# Altium PCB MainFCC_PCBBoard.PcbDoc (part 3 of 3)
Units mm, origin at the board's own origin, x right, y up, seen from the top; angles counter-clockwise.
Board outline 100 x 50 mm, 6 copper layers (Top Signal, GND1, Power, Signal, GND 2, Bottom Signal), stack 1.642 mm thick; 119 components, 79 nets, 546 pads, 1133 vias.
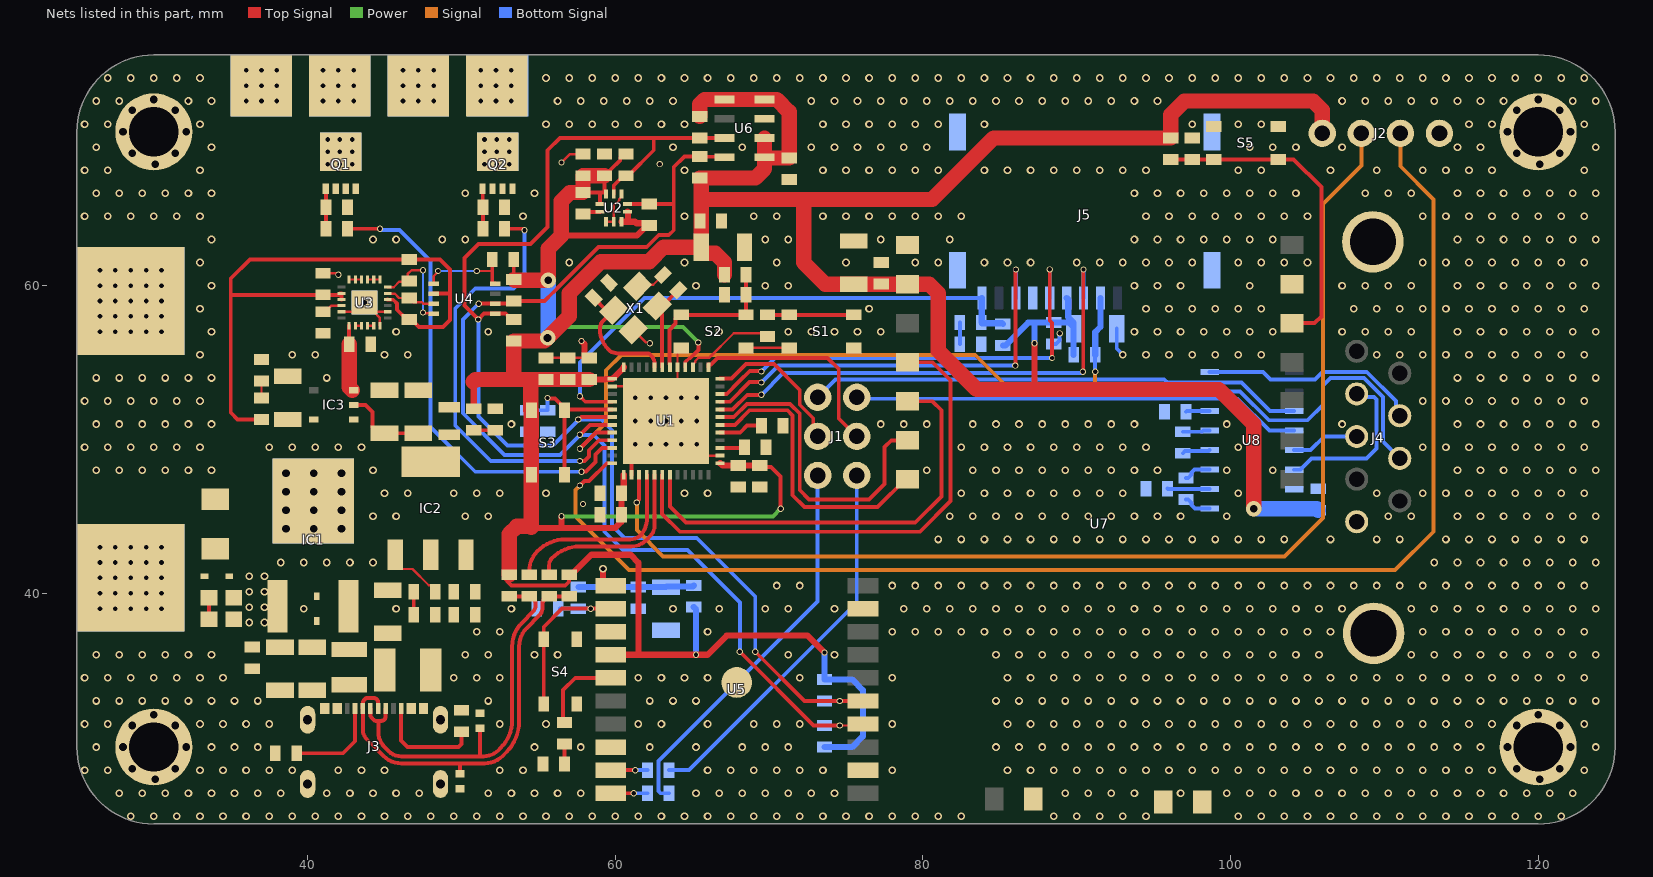
[diagram p6: the nets of this part, all layers, seen from the top]

## Part data (continued)
U8: library part MergenElektronik_Interfaces_RS232s_MAX3232ESE+, "Mergen Elektronik - Interfaces - RS232s - MAX3232ESE+", Manufacturer="Analog Devices Inc./Maxim Integrated", Operating Supply Voltage="3V up to 5.5V", Package=SOIC-16, Supplier Part Number 1=MAX3232ESE+-ND, Temperature="-40°C up to 85°C", Digi-Key Number=MAX3232ESE+-ND, Farnell Number=2519459, Manufacturer Number=MAX3232ESE+, Model="RS232 Interfaces", Mounting Type="Surface Mount", Mouser Number=700-MAX3232ESE, Protocol=RS232, Supplier 1=Digi-Key, Supplier 2=Mouser, Supplier Part Number 2=700-MAX3232ESE
X1: library part MergenElektronik_Oscillators_Crystals_4_SMD_26MHz, "Mergen Elektronik - Oscilators - Crystals - 4-SMD - 26 MHz", Load Capacitance="18 pF", Manufacturer="TXC CORPORATION", Manufacturer Number=7M-26.000MAAJ-T, Package=4-SMD, Supplier Part Number 1=2151-RH100-12.000-18-2030-TRCT-ND, Temperature="-20°C up to 70°C", Digi-Key Number=887-1133-2-ND, Farnell Number=1842069, Frequency="26 MHz", Model="Crystal Oscilator", Mounting Type="Surface Mount", Mouser Number=717-7M-26.000MAAJ-T, Supplier 1=Digi-Key, Supplier 2=Mouser, Supplier Part Number 2=717-7M-26.000MAAJ-T

## Free pads (board coordinates)
  round 5 hole 3.2: 1(30,70) 2(30,30) 3(120,70) 4(120,30)
  rect 7x7 smd: 5(28.5,59) c(28.5,41)
  rect 7x7 smd far side: 5(28.5,59) c(28.5,41)
  round 0.5 hole 0.5: 6(30,32.1) 6(30,72.1) 6(120,32.1) 6(120,72.1) 7(32.1,30) 7(32.1,70) 7(122.1,30) 7(122.1,70) 8(30.1,27.9) 8(30.1,67.9) 8(31.4,28.6) 8(31.4,68.6) 8(120.1,27.9) 8(120.1,67.9) 8(121.4,28.6) 8(121.4,68.6) 9(28,30) 9(28,70) 9(28.6,28.6) 9(28.6,31.4) 9(28.6,68.6) 9(28.6,71.4) 9(31.4,31.4) 9(31.4,71.4) 9(118,30) 9(118,70) 9(118.6,28.6) 9(118.6,31.4) 9(118.6,68.6) 9(118.6,71.4) 9(121.4,31.4) 9(121.4,71.4)
  rect 4x4 smd: 10(37,73) 10(42.1,73) 10(47.2,73) 10(52.3,73)
  rect 4x4 smd far side: 10(37,73) 10(42.1,73) 10(47.2,73) 10(52.35,73)
  rect 4x4 on Mid2: 10(37,73) 10(47.2,73)

## Via types
v1: diameter 0.5, hole 0.3, Top Signal to Bottom Signal, tented both sides, 987 vias
v2: diameter 0.5, hole 0.3, Top Signal to Bottom Signal, 86 vias
v3: diameter 0.406, hole 0.279, Top Signal to Bottom Signal, tented both sides, 44 vias
v4: diameter 0.5/0/0.5 (per signal layer), hole 0.3, Top Signal to Power, tented both sides, 8 vias
v5: diameter 1, hole 0.5, Top Signal to Bottom Signal, tented both sides, 3 vias
v6: diameter 0.406, hole 0.279, Top Signal to Power, tented both sides, 3 vias
v7: diameter 0.7, hole 0.7, Top Signal to Bottom Signal, 2 vias

## Nets (pads, with @x,y where several pads share a name; then routed paths per layer and width w, separated by ;. In a path a pad name is that pad's centre, name@x,y a point inside that pad or via, vN(x,y) a via of type N, cw(c..) or ccw(c..) an arc to the next point about the centre after c; other vN are vias at no path point)
1V8: C8.1 C32.1 IC3.5 R3.1 R18.2 R19.2 U3.8 U3.9 U3.22 U4.2 | length 43.2
  Top Signal w0.254: R3.1@37,51.3 35.45,51.3 35,51.75 35,59.375 ; U3.9@42.2,59.1 U3.8@42.2,59.5 42.104,59.5 42.004,59.4 C32.1@41,59.4 35.025,59.4 35,59.375 ; U3.22@45.2,59.1 45.221,59.079 45.566,59.079 45.821,58.825 45.821,58.429 46.45,57.8 R18.2@46.6,57.8 46.75,57.8 47.25,57.3 48.8,57.3 49.255,57.755 49.255,59.4 ; U4.2@48.2,59.475 49.18,59.475 49.255,59.4 ; 35,59.375 35,60.45 36.25,61.7 R19.2@46.6,61.7 48.6,61.7 49.255,61.045 49.255,59.4
3V3: C6.1 C7.1 C9.1 C10.1 C11.1 C12.1 C13.1 C14.1 C15.1 C16.1 C17.1 C29.1 C30.1 C31.1 C37.1 C38.1 C39.1 C41.1 C46.1 C47.1 FB1.1 IC3.1 IC3.3 J2.4 J5.P4 PTC1.2 R2.1 R5.1 R8.2 R9.2 R14.2 R15.2 R16.2 R17.2 R20.2 R21.2 R22.1 R23.1 R28.2 R29.2 R30.1 R35.1 R36.1 S3.1 U1.1 U1.9 U1.24 U1.36 U1.48 U2.1 U2.5 U2.6 U2.10 U3.13 U5.4 U6.1 U6.2 U6.4 U6.5 U7.2 U8.16 | length 303.3
  Top Signal w0.254: C31.1@42.7,56.2 U3.13@42.7,57.4 ; R8.2@53.1,41.2 53,41.1 53,40.75 53.25,40.5 56.75,40.5 57,40.75 R9.2@57,41.2 ; R20.2@53.4,60.4 R17.2@53.4,61.7 ; R16.2@57.9,66.05 59,66.05 ; U2.6@59,65.3 59,66.05 ; R15.2@60.7,68.55 60.55,68.55 60.327,68.327 60.327,68.177 59.673,67.523 59.673,67.373 59.45,67.15 C29.1@59.3,67.15 59.3,66.221 59.398,66.123 59.398,66.05 59,66.05 ; U1.9@64.55,54.7 64.552,54.702 64.552,55.022 64.809,55.279 64.875,55.279 65.4,55.805 v6(65.4,56.3) ; C14.1@69.4,48.3 69.481,48.219 70.132,48.219 70.75,47.601 v6(70.75,45.5)
  Top Signal w0.3: 65.5,65.6 65.6,65.6
  Top Signal w0.4: 42.7,53.5 42.9,53.3 42.9,53.2 IC3.3@43,53.2 ; R2.1@50.8,52 50.8,53.466 ; 54.55,44.298 54.5,44.248 56.5,44.248 ; v6(56.5,45) 56.5,44.248 ; 56.5,63.25 61.4,63.25 62.05,63.9 R14.2@62.2,63.9 62.05,64.05 61.375,64.05 61.275,64.15 60.838,64.15 ; R9.2@57,41.2 57.15,41.2 58.45,42.5 61,42.5 61.5,42 61.5,36 ; C10.1@58.3,53.9 59.327,53.9 59.354,53.927 59.777,53.927 U1.48@59.8,53.95 59.825,53.95 60.55,54.675 U1.1@60.55,54.7 ; U5.4@59.7,36 61.5,36 ; U2.10@60.4,64.15 60.838,64.15 ; U1.36@60.55,47.7 60.55,46.65 C11.1@60.4,46.5 C12.1@60.4,45.1 60.4,44.65 59.998,44.248 56.5,44.248 ; U2.1@60.8,64.8 60.838,64.762 60.838,64.15 ; U1.24@66.8,48.45 66.825,48.45 66.975,48.3 C13.1@68,48.3 C14.1@69.4,48.3 ; 70.5,72.1 70.9,72.1 ; v3(73.6,36.148) v3(73.6,36.148) 72.5,37.25 67.25,37.25 66.001,36.001 65.251,36.001 v3(65.25,36) 61.5,36 ; 80.766,60 81,59.766 81,59.5 ; 87,53.25 87.25,53.5 v3(87.25,56.25)
  Top Signal w1: C31.1@42.7,56.2 42.7,53.4 IC3.3@42.9,53.2 ; 50.75,53.75 50.9,53.9 53.5,53.9 ; R8.2@53.1,41.2 53.1,43.85 53.598,44.348 54.5,44.348 54.55,44.298 S3.1@54.55,47.7 S3.1@54.55,51.9 ; R20.2@53.4,60.4 53.45,60.35 v5(55.65,60.35) 55.65,62.4 56.5,63.25 56.5,65.5 57.05,66.05 R16.2@57.9,66.05 C30.1@57.9,67.15 C29.1@59.3,67.15 ; S3.1@54.5,51.9 54.5,53.9 ; C10.1@58.3,53.9 C15.1@56.9,53.9 C9.1@55.5,53.9 54.5,53.9 ; R29.2@65.5,71 65.5,71.8 65.8,72.1 U6.5@67.1,72.1 U6.4@69.7,72.1 70.5,72.1 71.3,71.3 C37.1@71.3,68.3 69.75,68.3 U6.1@69.7,68.35 ; R5.1@67.1,60.7 67.1,61.514 66.514,62.1 65.6,62.1 C16.1@65.6,62.5 ; U6.2@69.7,69.6 U6.1@69.7,68.35 ; v5(101.5,45.5) 101.5,51 99.25,53.25 87,53.25 83.5,53.25 81,55.75 81,59.5 80.4,60.1 U7.2@79,60.1 C39.1@77.3,60.1 C38.1@75.5,60.1 73.65,60.1 72.25,61.5 72.25,65.6 ; J2.4@105.96,69.9 105.96,71.414 105.374,72 97,72 96.1,71.1 R30.1@96.1,69.6 84.6,69.6 80.6,65.6 72.25,65.6 ; 53.5,53.9 53.4,54 R21.2@53.4,56.4 55.4,56.4 v5(55.6,56.6) 57.001,58.001 57.001,59.497 57.209,59.704 57.209,59.709 59.063,61.563 62.21,61.563 63.147,62.5 C16.1@65.6,62.5 ; 53.5,53.9 54.5,53.9 ; C16.1@65.6,62.5 65.6,65.6 ; 65.6,65.6 72.25,65.6 ; 65.6,65.6 65.6,66.9 R28.2@65.5,67 69.114,67 69.7,67.586 U6.1@69.7,68.35
  Power w0.254: v5(55.6,56.6) 56.3,57.3 64.4,57.3 v6(65.4,56.3) ; v6(56.5,45) 70.25,45 v6(70.75,45.5)
  Bottom Signal w0.4: FB1.1@65.1,39.1 65.25,38.95 v3@65.25,36.002 ; R22.1@73.6,30 75.4,30 76.1,30.7 76.1,33.7 75.4,34.4 R23.1@73.6,34.4 v3(73.6,36.148) ; R36.1@85.2,56.1 85.35,56.1 86.85,57.6 87.25,57.6 ; v3(87.25,56.25) 87.25,57.6 ; J5.P4@89.345,59.2 89.445,59.1 89.445,57.955 89.8,57.6 89.8,57.3 89.5,57.6 C47.1@88.5,57.6 87.25,57.6 ; R35.1@89.8,55.5 C46.1@89.8,57.2
  Bottom Signal w1: v5(55.6,56.6) 55.65,56.65 v5(55.65,60.35) ; v5(101.5,45.5) 105.6,45.5 C41.1@105.7,45.4
5V: C3.1 C4.1 C5.1 D3.2 IC1.3 IC2.3 R1.1
CTS: J4.7 U8.8 | length 14.4
  Bottom Signal w0.254: U8.8@98.636,54.393 102.107,54.393 102.597,53.903 105.479,53.903 105.972,54.396 108.854,54.396 110.762,52.488 110.762,51.778 J4.7@111,51.54
GND: C1.2 C2.2 C3.2 C4.2 C5.2 C6.2 C7.2 C8.2 C9.2 C10.2 C11.2 C12.2 C13.2 C14.2 C15.2 C16.2 C17.2 C18.2 C19.2 C20.2 C23.2 C24.2 C25.2 C26.2 C27.2 C28.2 C29.2 C30.2 C31.2 C32.2 C33.2 C34.2 C35.2 C36.2 C37.2 C38.2 C39.2 C40.2 C41.2 C42.2 C43.2 C46.2 C47.2 D2.2 D4.2 D5.2 D6.1 D7.1 D8.2 D9.2 IC1.2 IC2.1 IC3.2 J2.1 J3.A1 J3.A12 J3.B1 J3.B12 J3.Shield J4.5 J4.Shield J5.P6 J5.SHIELD pad.1 pad.2 pad.3 pad.4 pad.5 pad.6 pad.7 pad.8 pad.9 Q1.2 Q1.3 Q1.4 Q2.2 Q2.3 Q2.4 R6.1 R7.1 R12.2 R13.2 R33.1 R34.1 S1.2 S2.1 S4.1 S5.1 U1.8 U1.23 U1.35 U1.47 U1.49 U2.3 U2.8 U2.9 U3.11 U3.18 U3.20 U3.25 U5.3 U5.8 U5.12 U5.19 U5.21 U6.3 U7.1 U7.12 U7.13 U7.14 U7.23 U8.15 X1.3 | length 52.1
  Top Signal w0.152: C32.2@41,60.8 41.831,60.8 41.931,60.7 v3(42,60.7) ; U3.11@42.2,58.3 43.1,58.3 U3.25@43.7,58.9 ; U3.18@44.7,57.4 44.7,57.9 44.3,58.3 U3.20@45.2,58.3 ; IC2.1@45.7,42.5 45.7,42 46.124,41.576 46.824,41.576 47.876,40.524 48.026,40.524 48.3,40.25 D2.2@48.3,40.1 ; C9.2@55.5,55.3 C15.2@56.9,55.3 58.15,55.3 C10.2@58.3,55.3 ; v3(56.5,68) 57.05,68.55 C30.2@57.9,68.55 ; U2.8@59.4,64.15 U2.9@59.9,64.15 59.9,65.202 60.254,65.555 60.254,65.629 60.4,65.775 U2.3@60.4,65.95 ; U1.47@59.8,53.45 61.05,53.45 62.05,52.45 U1.49@63.3,51.2 ; X1.3@61.173,57.127 62.001,56.299 62.201,56.299 v3(62.25,56.25) ; X1.3@61.456,59.956 61.562,60.062 62.472,60.062 C24.2@63.105,60.695 ; S2.1@64.3,55.95 64.05,55.7 U1.8@64.05,54.7 64.05,51.95 U1.49@63.3,51.2 ; U1.23@66.8,48.95 65.55,48.95 64.55,49.95 U1.49@63.3,51.2 ; S2.1@68.5,55.95 S1.2@71.3,55.95
  Top Signal w0.254: C2.2@33.6,38.3 C1.2@33.6,39.7 ; J3.A1@40.97,32.5 J3.B12@41.27,32.5 ; IC3.2@43,52.25 43.75,52.25 44.227,51.773 44.227,50.773 44.6,50.4 C7.2@45,50.4 C6.2@47.2,50.4 ; J3.B1@47.38,32.5 J3.A12@47.68,32.5 ; C12.2@59,45.1 C12.2@59,45.25 ; U1.35@61.05,47.7 61.05,48.95 U1.49@63.3,51.2
  Top Signal w0.4: v3(57.8,56.4) 57.8,56.398 58,56.198 58,55.45 C10.2@58.15,55.3
  Bottom Signal w0.254: C47.2@88.5,56.2 88.65,56.2 88.873,56.423 88.873,56.867 v3(88.9,56.894) ; C46.2@92.6,57.2 92.6,55.9 v1(93,55.5)
  other v1: 28.5,25.5 30,25.5 31.5,25.5 33,25.5 34.5,25.5 36,25.5 37.5,25.5 39,25.5 40.5,25.5 42,25.5 43.5,25.5 45,25.5 46.5,25.5 48,25.5 49.5,25.5 51,25.5 52.5,25.5 54,25.5 55.5,25.5 57,25.5 58.5,25.5 60,25.5 61.5,25.5 63,25.5 64.5,25.5 66,25.5 67.5,25.5 69,25.5 70.5,25.5 72,25.5 73.5,25.5 75,25.5 76.5,25.5 78,25.5 79.5,25.5 81,25.5 82.5,25.5 88.5,25.5 90,25.5 91.5,25.5 93,25.5 94.5,25.5 100.5,25.5 102,25.5 103.5,25.5 105,25.5 106.5,25.5 108,25.5 109.5,25.5 111,25.5 112.5,25.5 114,25.5 115.5,25.5 117,25.5 118.5,25.5 120,25.5 121.5,25.5 27.75,27 29.25,27 30.75,27 32.25,27 33.75,27 35.25,27 36.75,27 38.25,27 41.25,27 42.75,27 44.25,27 45.75,27 47.25,27 51.75,27 53.25,27 54.75,27 56.25,27 57.75,27 65.25,27 66.75,27 68.25,27 69.75,27 71.25,27 72.75,27 74.25,27 89.25,27 90.75,27 92.25,27 93.75,27 96.75,27 99.75,27 101.25,27 102.75,27 104.25,27 105.75,27 107.25,27 108.75,27 110.25,27 111.75,27 113.25,27 114.75,27 116.25,27 117.75,27 119.25,27 120.75,27 122.25,27 25.5,28.5 27,28.5 33,28.5 34.5,28.5 36,28.5 37.5,28.5 39,28.5 42,28.5 43.5,28.5 45,28.5 52.5,28.5 54,28.5 66,28.5 67.5,28.5 69,28.5 70.5,28.5 72,28.5 73.5,28.5 78,28.5 85.5,28.5 87,28.5 88.5,28.5 90,28.5 91.5,28.5 93,28.5 94.5,28.5 96,28.5 97.5,28.5 99,28.5 100.5,28.5 102,28.5 103.5,28.5 105,28.5 106.5,28.5 108,28.5 109.5,28.5 111,28.5 112.5,28.5 114,28.5 115.5,28.5 117,28.5 123,28.5 26.25,30 33.75,30 35.25,30 36.75,30 54.75,30 57.75,30 62.25,30 65.25,30 68.25,30 69.75,30 71.25,30 84.75,30 86.25,30 87.75,30 89.25,30 90.75,30 92.25,30 93.75,30 95.25,30 96.75,30 98.25,30 99.75,30 101.25,30 102.75,30 104.25,30 105.75,30 107.25,30 108.75,30 110.25,30 111.75,30 113.25,30 114.75,30 116.25,30 123.75,30 25.5,31.5 27,31.5 33,31.5 34.5,31.5 36,31.5 37.5,31.5 52.5,31.5 55.5,31.5 61.5,31.5 63,31.5 66,31.5 69,31.5 70.5,31.5 72,31.5 78,31.5 85.5,31.5 87,31.5 88.5,31.5 90,31.5 91.5,31.5 93,31.5 94.5,31.5 96,31.5 97.5,31.5 99,31.5 100.5,31.5 102,31.5 103.5,31.5 105,31.5 106.5,31.5 108,31.5 109.5,31.5 111,31.5 112.5,31.5 114,31.5 115.5,31.5 117,31.5 123,31.5 26.25,33 27.75,33 29.25,33 30.75,33 32.25,33 33.75,33 35.25,33 36.75,33 51.75,33 62.25,33 63.75,33 65.25,33 84.75,33 86.25,33 87.75,33 89.25,33 90.75,33 92.25,33 93.75,33 95.25,33 96.75,33 98.25,33 99.75,33 101.25,33 102.75,33 104.25,33 105.75,33 107.25,33 108.75,33 110.25,33 111.75,33 113.25,33 114.75,33 116.25,33 117.75,33 119.25,33 120.75,33 122.25,33 123.75,33 25.5,34.5 27,34.5 28.5,34.5 30,34.5 31.5,34.5 33,34.5 34.5,34.5 49.5,34.5 51,34.5 52.5,34.5 61.5,34.5 63,34.5 64.5,34.5 66,34.5 72,34.5 78,34.5 85.5,34.5 87,34.5 88.5,34.5 90,34.5 91.5,34.5 93,34.5 94.5,34.5 96,34.5 97.5,34.5 99,34.5 100.5,34.5 102,34.5 103.5,34.5 105,34.5 106.5,34.5 108,34.5 109.5,34.5 111,34.5 112.5,34.5 114,34.5 115.5,34.5 117,34.5 118.5,34.5 120,34.5 121.5,34.5 123,34.5 26.25,36 27.75,36 29.25,36 30.75,36 32.25,36 33.75,36 50.25,36 51.75,36 54.75,36 56.25,36 71.25,36 74.25,36 84.75,36 86.25,36 87.75,36 89.25,36 90.75,36 92.25,36 93.75,36 95.25,36 96.75,36 98.25,36 99.75,36 101.25,36 102.75,36 104.25,36 105.75,36 111.75,36 113.25,36 114.75,36 116.25,36 117.75,36 119.25,36 120.75,36 122.25,36 123.75,36 51,37.5 52.5,37.5 66,37.5 78,37.5 79.5,37.5 81,37.5 82.5,37.5 84,37.5 85.5,37.5 87,37.5 88.5,37.5 90,37.5 91.5,37.5 93,37.5 94.5,37.5 96,37.5 97.5,37.5 99,37.5 100.5,37.5 102,37.5 103.5,37.5 105,37.5 106.5,37.5 112.5,37.5 114,37.5 115.5,37.5 117,37.5 118.5,37.5 120,37.5 121.5,37.5 123,37.5 39.75,39 45.75,39 53.25,39 63.75,39 66.75,39 69.75,39 71.25,39 74.25,39 78.75,39 80.25,39 81.75,39 83.25,39 84.75,39 86.25,39 87.75,39 89.25,39 90.75,39 92.25,39 93.75,39 95.25,39 96.75,39 98.25,39 99.75,39 101.25,39 102.75,39 104.25,39 105.75,39 107.25,39 111.75,39 113.25,39 114.75,39 116.25,39 117.75,39 119.25,39 120.75,39 122.25,39 123.75,39 70.5,40.5 72,40.5 78,40.5 79.5,40.5 81,40.5 82.5,40.5 84,40.5 85.5,40.5 87,40.5 88.5,40.5 90,40.5 91.5,40.5 93,40.5 94.5,40.5 96,40.5 97.5,40.5 99,40.5 100.5,40.5 102,40.5 103.5,40.5 105,40.5 106.5,40.5 108,40.5 109.5,40.5 111,40.5 112.5,40.5 114,40.5 115.5,40.5 117,40.5 118.5,40.5 120,40.5 121.5,40.5 123,40.5 38.25,42 39.75,42 41.25,42 42.75,42 44.25,42 113.25,42 114.75,42 116.25,42 117.75,42 119.25,42 120.75,42 122.25,42 123.75,42 81,43.5 82.5,43.5 84,43.5 85.5,43.5 87,43.5 88.5,43.5 90,43.5 91.5,43.5 93,43.5 94.5,43.5 96,43.5 97.5,43.5 99,43.5 100.5,43.5 102,43.5 103.5,43.5 106.5,43.5 109.5,43.5 111,43.5 114,43.5 115.5,43.5 117,43.5 118.5,43.5 120,43.5 121.5,43.5 123,43.5 44.25,45 45.75,45 50.25,45 51.75,45 81.75,45 83.25,45 84.75,45 86.25,45 87.75,45 89.25,45 90.75,45 92.25,45 93.75,45 95.25,45 96.75,45 99.75,45 110.25,45 111.75,45 114.75,45 116.25,45 117.75,45 119.25,45 120.75,45 122.25,45 123.75,45 45,46.5 46.5,46.5 49.5,46.5 51,46.5 52.5,46.5 55.5,46.5 64.5,46.5 66,46.5 82.5,46.5 84,46.5 85.5,46.5 87,46.5 88.5,46.5 90,46.5 91.5,46.5 93,46.5 100.5,46.5 109.5,46.5 112.5,46.5 114,46.5 115.5,46.5 117,46.5 118.5,46.5 120,46.5 121.5,46.5 123,46.5 26.25,48 27.75,48 29.25,48 30.75,48 32.25,48 33.75,48 44.25,48 80.25,48 83.25,48 84.75,48 86.25,48 87.75,48 89.25,48 90.75,48 92.25,48 93.75,48 95.25,48 99.75,48 102.75,48 114.75,48 116.25,48 117.75,48 119.25,48 120.75,48 122.25,48 123.75,48 25.5,49.5 27,49.5 28.5,49.5 30,49.5 31.5,49.5 33,49.5 37.5,49.5 39,49.5 40.5,49.5 42,49.5 43.5,49.5 82.5,49.5 84,49.5 85.5,49.5 87,49.5 88.5,49.5 90,49.5 91.5,49.5 93,49.5 94.5,49.5 100.5,49.5 112.5,49.5 114,49.5 115.5,49.5 117,49.5 118.5,49.5 120,49.5 121.5,49.5 123,49.5 26.25,51 27.75,51 29.25,51 30.75,51 32.25,51 33.75,51 53.25,51 77.25,51 78.75,51 80.25,51 83.25,51 84.75,51 86.25,51 87.75,51 89.25,51 90.75,51 92.25,51 93.75,51 99.75,51 107.25,51 114.75,51 116.25,51 117.75,51 119.25,51 120.75,51 122.25,51 123.75,51 25.5,52.5 27,52.5 28.5,52.5 30,52.5 31.5,52.5 33,52.5 112.5,52.5 114,52.5 115.5,52.5 117,52.5 118.5,52.5 120,52.5 121.5,52.5 123,52.5 26.25,54 27.75,54 29.25,54 30.75,54 32.25,54 33.75,54 41.25,54 114.75,54 116.25,54 117.75,54 119.25,54 120.75,54 122.25,54 123.75,54 33,55.5 39,55.5 40.5,55.5 45,55.5 46.5,55.5 94.5,55.5 96,55.5 97.5,55.5 99,55.5 100.5,55.5 102,55.5 109.5,55.5 111,55.5 112.5,55.5 114,55.5 115.5,55.5 117,55.5 118.5,55.5 120,55.5 121.5,55.5 123,55.5 33.75,57 45.75,57 51.75,57 66.75,57 71.25,57 72.75,57 74.25,57 75.75,57 77.25,57 93.75,57 95.25,57 96.75,57 98.25,57 99.75,57 101.25,57 102.75,57 107.25,57 108.75,57 110.25,57 111.75,57 114.75,57 116.25,57 117.75,57 119.25,57 120.75,57 122.25,57 123.75,57 33,58.5 76.5,58.5 94.5,58.5 96,58.5 97.5,58.5 99,58.5 100.5,58.5 102,58.5 108,58.5 109.5,58.5 111,58.5 112.5,58.5 114,58.5 115.5,58.5 117,58.5 118.5,58.5 120,58.5 121.5,58.5 123,58.5 33.75,60 65.25,60 69.75,60 71.25,60 93.75,60 95.25,60 96.75,60 101.25,60 107.25,60 108.75,60 110.25,60 111.75,60 114.75,60 116.25,60 117.75,60 119.25,60 120.75,60 122.25,60 123.75,60 33,61.5 57,61.5 64.5,61.5 70.5,61.5 75,61.5 79.5,61.5 81,61.5 84,61.5 85.5,61.5 87,61.5 90,61.5 91.5,61.5 93,61.5 94.5,61.5 96,61.5 97.5,61.5 100.5,61.5 102,61.5 103.5,61.5 105,61.5 112.5,61.5 114,61.5 115.5,61.5 117,61.5 118.5,61.5 120,61.5 121.5,61.5 123,61.5 33.75,63 44.25,63 45.75,63 48.75,63 50.25,63 69.75,63 71.25,63 77.25,63 81.75,63 93.75,63 95.25,63 96.75,63 98.25,63 99.75,63 101.25,63 102.75,63 114.75,63 116.25,63 117.75,63 119.25,63 120.75,63 122.25,63 123.75,63 25.5,64.5 27,64.5 28.5,64.5 30,64.5 31.5,64.5 33,64.5 54,64.5 64.5,64.5 69,64.5 70.5,64.5 73.5,64.5 75,64.5 76.5,64.5 78,64.5 79.5,64.5 81,64.5 82.5,64.5 94.5,64.5 96,64.5 97.5,64.5 99,64.5 100.5,64.5 102,64.5 103.5,64.5 105,64.5 112.5,64.5 114,64.5 115.5,64.5 117,64.5 118.5,64.5 120,64.5 121.5,64.5 123,64.5 26.25,66 27.75,66 29.25,66 30.75,66 32.25,66 33.75,66 50.25,66 54.75,66 93.75,66 95.25,66 96.75,66 98.25,66 99.75,66 101.25,66 102.75,66 104.25,66 108.75,66 110.25,66 111.75,66 114.75,66 116.25,66 117.75,66 119.25,66 120.75,66 122.25,66 123.75,66 25.5,67.5 27,67.5 33,67.5 64.5,67.5 73.5,67.5 75,67.5 76.5,67.5 78,67.5 79.5,67.5 81,67.5 84,67.5 85.5,67.5 87,67.5 88.5,67.5 90,67.5 91.5,67.5 93,67.5 94.5,67.5 100.5,67.5 102,67.5 106.5,67.5 109.5,67.5 112.5,67.5 114,67.5 115.5,67.5 117,67.5 123,67.5 26.25,69 33.75,69 63.75,69 68.25,69 72.75,69 74.25,69 75.75,69 77.25,69 78.75,69 80.25,69 101.25,69 102.75,69 104.25,69 107.25,69 114.75,69 116.25,69 123.75,69 25.5,70.5 27,70.5 33,70.5 55.5,70.5 57,70.5 58.5,70.5 60,70.5 61.5,70.5 63,70.5 64.5,70.5 73.5,70.5 75,70.5 76.5,70.5 78,70.5 79.5,70.5 81,70.5 84,70.5 97.5,70.5 100.5,70.5 102,70.5 115.5,70.5 117,70.5 123,70.5 26.25,72 27.75,72 32.25,72 33.75,72 56.25,72 57.75,72 59.25,72 60.75,72 62.25,72 63.75,72 72.75,72 74.25,72 75.75,72 77.25,72 78.75,72 80.25,72 81.75,72 83.25,72 84.75,72 86.25,72 87.75,72 89.25,72 90.75,72 92.25,72 93.75,72 95.25,72 107.25,72 108.75,72 110.25,72 111.75,72 113.25,72 114.75,72 116.25,72 117.75,72 122.25,72 123.75,72 27,73.5 28.5,73.5 30,73.5 31.5,73.5 33,73.5 55.5,73.5 57,73.5 58.5,73.5 60,73.5 61.5,73.5 63,73.5 64.5,73.5 66,73.5 67.5,73.5 69,73.5 70.5,73.5 72,73.5 73.5,73.5 75,73.5 76.5,73.5 78,73.5 79.5,73.5 81,73.5 82.5,73.5 84,73.5 85.5,73.5 87,73.5 88.5,73.5 90,73.5 91.5,73.5 93,73.5 94.5,73.5 96,73.5 97.5,73.5 99,73.5 100.5,73.5 102,73.5 103.5,73.5 105,73.5 106.5,73.5 108,73.5 109.5,73.5 111,73.5 112.5,73.5 114,73.5 115.5,73.5 117,73.5 118.5,73.5 120,73.5 121.5,73.5 123,73.5
  other v2: 26.5,57 27.5,57 28.5,57 29.5,57 30.5,57 26.5,58 27.5,58 28.5,58 29.5,58 30.5,58 26.5,59 27.5,59 28.5,59 29.5,59 30.5,59 26.5,60 27.5,60 28.5,60 29.5,60 30.5,60 26.5,61 27.5,61 28.5,61 29.5,61 30.5,61
  other v3: 57.9,45.8 62.9,67.9
GPS_VCC: C34.1 C35.1 FB1.2 R26.2 U5.1 | length 10.2
  Top Signal w0.4: v1(59.2,41.6) 59.2,40.8 59.5,40.5 U5.1@59.7,40.5
  Bottom Signal w0.4: R26.2@57.6,40.4 59.2,40.4 ; v1(59.2,41.6) 59.2,40.4 ; FB1.2@65.1,40.5 65.05,40.45 63.35,40.45 C34.1@63.3,40.4 C35.1@61.5,40.4 59.2,40.4
NetC18_1: C18.1 R5.2 S2.2 U1.7 | length 10.6
  Top Signal w0.254: U1.7@63.55,54.7 63.55,54.871 63.521,54.9 63.521,57.121 63.927,57.527 63.927,57.877 64.15,58.1 S2.2@64.3,58.1 S2.2@68.5,58.1 C18.1@68.5,59.4 R5.2@68.5,60.7
NetC19_1: C19.1 U1.22 | length 1.6
  Top Signal w0.254: U1.22@66.8,49.45 68.35,49.45 C19.1@68.4,49.5
NetC20_1: C20.1 R7.2 S3.2 U1.44 | length 11
  Top Signal w0.254: v3(55.6,52.7) 55.629,52.671 56.079,52.671 56.7,52.05 S3.2@56.7,51.9 ; S3.2@56.7,47.7 S3.2@56.8,47.8 ; S3.2@56.7,47.8 S3.2@56.7,51.9 ; U1.44@59.8,51.95 56.75,51.95 S3.2@56.7,51.9
  Bottom Signal w0.254: R7.2@54.3,51.9 C20.1@55.6,51.9 v3(55.6,52.7)
NetC23_1: C23.1 U1.5 X1.1 | length 8.4
  Top Signal w0.254: C23.1@58.605,59.205 59.41,58.4 X1.1@59.9,58.4 59.212,57.712 ccw(c59.724,57.2) 59,57.2 ccw(c60.931,57.2) 59.566,55.834 ccw(c60.131,56.4) 60.131,55.6 62.059,55.6 cw(c62.059,55.259) 62.3,55.5 cw(c61.696,54.896) 62.55,54.896 U1.5@62.55,54.7
NetC24_1: C24.1 U1.6 X1.2 | length 5.9
  Top Signal w0.254: U1.6@63.05,54.7 63.05,57.907 ccw(c61.952,57.907) X1.2@62.728,58.683 63.073,58.683 C24.1@64.095,59.705
NetC28_1: C28.1 J3.A4 J3.A9 J3.B4 J3.B9 L1.2
NetC33_1: C33.1 U3.10 | length 1.4
  Top Signal w0.152: C33.1@41,58.3 41.15,58.3 41.55,58.7 U3.10@42.2,58.7
NetC36_1: C36.1 R26.1 S4.2 U5.2 | length 11.9
  Top Signal w0.254: S4.2@55.35,32.8 S4.2@55.35,37 55.35,37.812 56.538,39 v3(58.4,39) U5.2@59.7,39
  Bottom Signal w0.254: C36.1@56.4,39 R26.1@57.6,39 v3(58.4,39)
NetC40_1: C40.1 R30.2 S5.2 U7.22 | length 21
  Top Signal w0.254: R30.2@96.1,68.2 C40.1@97.5,68.2 S5.2@98.9,68.2 S5.2@103.1,68.2 104.1,68.2 105.9,66.4 105.9,58 105.46,57.56 U7.22@104,57.56
NetC42_1: C42.1 U8.2 | length 2.7
  Bottom Signal w0.254: C42.1@95.9,46.8 95.927,46.773 U8.2@98.636,46.773
NetC43_1: C43.1 U8.6 | length 1.6
  Bottom Signal w0.254: C43.1@97.1,51.8 97.153,51.853 U8.6@98.636,51.853
NetC44_1: C44.1 U8.1 | length 1.9
  Bottom Signal w0.254: C44.1@97.1,46.1 97.25,46.1 97.473,45.877 97.473,45.727 97.697,45.503 U8.1@98.636,45.503
NetC44_2: C44.2 U8.3 | length 1.8
  Bottom Signal w0.254: C44.2@97.1,47.5 97.25,47.5 97.473,47.723 97.473,47.861 97.655,48.043 U8.3@98.636,48.043
NetC45_1: C45.1 U8.4 | length 1.8
  Bottom Signal w0.254: C45.1@96.9,49.1 97.04,49.24 98.563,49.24 U8.4@98.636,49.313
NetC45_2: C45.2 U8.5 | length 1.8
  Bottom Signal w0.254: C45.2@96.9,50.5 98.153,50.5 98.236,50.583 U8.5@98.636,50.583
NetD1_1: D1.1 F1.2
NetD2_1: D2.1 R1.2 | length 1.5
  Top Signal w0.254: R1.2@46.9,38.6 D2.1@46.9,40.1
NetD4_1: D4.1 R2.2 | length 1.4
  Top Signal w0.254: R2.2@50.8,50.6 D4.1@52.2,50.6
NetD5_1: D5.1 R3.2 | length 1.1
  Top Signal w0.152: R3.2@37,52.7 D5.1@37,53.8
NetD8_1: D8.1 R27.1 | length 1.3
  Top Signal w0.254: D8.1@56.7,28.9 R27.1@56.7,30.2
NetD9_1: D9.1 R37.2 | length 1.4
  Bottom Signal w0.254: D9.1@82.4,56.2 R37.2@82.4,57.6
NetJ1_1: J1.1 R24.2 | length 25
  Bottom Signal w0.254: R24.2@63.5,28.5 64.8,28.5 75.7,39.4 J1.1@75.7,47.66
NetJ1_2: J1.2 U1.12 | length 14
  Top Signal w0.254: U1.12@66.05,54.7 66.05,54.871 66.052,54.873 66.223,54.873 66.65,55.3 73.8,55.3 74.532,54.568 74.532,51.368 J1.2@75.7,50.2
NetJ1_3: J1.3 U8.12 | length 29.3
  Bottom Signal w0.254: J1.3@75.7,52.74 75.797,52.643 100.457,52.643 102.527,50.573 U8.12@104.136,50.573
NetJ1_4: J1.4 R25.2 | length 25.6
  Bottom Signal w0.254: R25.2@63.5,27 62.949,27 62.8,27.149 62.8,29.1 73.16,39.46 J1.4@73.16,47.66
NetJ1_5: J1.5 U1.13 | length 9.8
  Top Signal w0.254: U1.13@66.8,53.95 67.55,53.95 68.494,54.894 70.322,54.894 71.992,53.224 71.992,52.256 72.868,51.379 72.868,50.492 J1.5@73.16,50.2
NetJ1_6: J1.6 U8.11 | length 32.3
  Bottom Signal w0.254: J1.6@73.16,52.74 74.328,53.908 95.692,53.908 95.9,53.7 100.703,53.7 102.56,51.843 U8.11@104.136,51.843
NetJ2_2: J2.2 U1.37 | length 89.9
  Top Signal w0.254: v3(57.7,47) 58,47.3 58.3,47.3 59.45,48.45 U1.37@59.8,48.45
  Signal w0.254: v3(57.7,47) 57.417,46.717 57.417,44.983 60.9,41.5 110.7,41.5 113.2,44 113.2,65.6 111.04,67.76 J2.2@111.04,69.9
NetJ2_3: J2.3 U1.34 | length 76
  Top Signal w0.254: v3(61.4,45.9) 61.4,45.941 61.55,46.091 U1.34@61.55,47.7
  Signal w0.254: v3(61.4,45.9) 61.4,44.1 63.1,42.4 103.5,42.4 106,44.9 106,65.3 108.5,67.8 J2.3@108.5,69.9
NetJ3_A5: J3.A5 R12.1 | length 6.2
  Top Signal w0.254: R12.1@39.3,29.6 42.3,29.6 43.08,30.38 J3.A5@43.08,32.5
NetJ3_B5: J3.B5 R13.1 | length 7.1
  Top Signal w0.254: J3.B5@46.08,32.5 46.08,30.42 46.5,30 49.8,30 50,30.2 R13.1@50,31
NetJ5_CD: J5.CD R36.2 R37.1 U1.45 | length 35.4
  Top Signal w0.254: v3(57.7,52.8) 58.05,52.45 U1.45@59.8,52.45
  Bottom Signal w0.254: v3(57.7,52.8) 57.7,55 61.9,59.2 J5.CD@83.845,59.2
  Bottom Signal w0.4: J5.CD@83.845,59.2 83.822,59.178 83.822,57.622 R37.1@83.8,57.6 83.85,57.55 85.15,57.55 R36.2@85.2,57.5
NetJ5_P2: J5.P2 R35.2 U1.41 | length 47.5
  Top Signal w0.254: v3(57.7,49.4) 58.75,50.45 U1.41@59.8,50.45
  Signal w0.254: v3(57.7,49.4) 59.4,51.1 59.4,54.5 60.4,55.5 83.4,55.5 85.8,53.1 90.7,53.1 91.2,53.6 v3(91.2,54.4)
  Bottom Signal w0.254: v3(91.2,54.4) R35.2@91.2,55.5
  Bottom Signal w0.4: R35.2@91.2,55.5 91.2,56.978 91.545,57.323 J5.P2@91.545,59.2
NetJ5_P3: J5.P3 U1.17 | length 33.1
  Top Signal w0.254: U1.17@66.8,51.95 67.63,51.95 68.58,52.9 v3(69.5,52.9) ; v3(90.4,54.4) 90.422,54.422 90.422,61.022 v3(90.445,61.045)
  Bottom Signal w0.254: v3(69.5,52.9) 70.915,54.315 90.274,54.315 90.359,54.4 v3(90.4,54.4) ; J5.P3@90.445,59.2 v3(90.445,61.045)
NetJ5_P5: J5.P5 U1.15 | length 30.3
  Top Signal w0.254: U1.15@66.8,52.95 67.25,52.95 68.056,53.756 68.74,54.44 69.471,54.44 v3(69.5,54.411) ; v3(88.245,61.055) 88.245,57.74 88.4,57.585 v3(88.4,55.3)
  Bottom Signal w0.254: v3(69.5,54.411) 70.389,55.3 v3(88.4,55.3) ; J5.P5@88.245,59.2 v3(88.245,61.055)
NetJ5_P7: J5.P7 U1.16 | length 28.3
  Top Signal w0.254: U1.16@66.8,52.45 67.45,52.45 68.729,53.729 69.471,53.729 v3(69.5,53.7) ; v3(86,54.8) 86.022,54.822 86.022,61.022 v3(86.045,61.045)
  Bottom Signal w0.254: v3(69.5,53.7) 70.6,54.8 v3(86,54.8) ; J5.P7@86.045,59.2 v3(86.045,61.045)
NetPTC1_1: IC2.2 PTC1.1
NetQ1_1: Q1.1 R31.2 R33.2 | length 2.6
  Top Signal w0.254: Q1.1@41.175,66.3 41.187,66.288 41.187,65.112 R33.2@41.2,65.1 R31.2@41.2,63.7
NetQ1_5: pad.10@42.1,73 Q1.5
  other v2: 41,72 42,72 43,72 41,73 42,73 43,73 41,74 42,74 43,74
NetQ2_1: Q2.1 R32.2 R34.2 | length 2.6
  Top Signal w0.254: Q2.1@51.375,66.3 51.387,66.288 51.387,65.112 R34.2@51.4,65.1 R32.2@51.4,63.7
NetQ2_5: pad.10@52.3,73 pad.10@52.35,73 Q2.5
  other v2: 51.25,72 52.25,72 53.25,72 51.25,73 52.25,73 53.25,73 51.25,74 52.25,74 53.25,74
NetR4_2: R4.2 S1.1 | length 5.6
  Top Signal w0.254: R4.2@69.9,58.1 S1.1@71.3,58.1 S1.1@75.5,58.1
NetR6_2: R6.2 U1.20 | length 2.9
  Top Signal w0.254: U1.20@66.8,50.45 68.125,50.45 68.575,50.9 R6.2@69.5,50.9
NetR14_1: R14.1 R20.1 R22.2 R28.1 U1.42 U2.2 U4.6 U5.14 U6.8 | length 77
  Top Signal w0.152: U6.8@67.075,68.375 U6.8@67.1,68.35 ; v3(74.6,31.4) 76,31.4 U5.14@76.1,31.5
  Top Signal w0.254: v3(51.125,58.825) U4.6@52.2,58.825 52.223,58.848 53.248,58.848 R20.1@53.4,59 55.4,59 55.971,59.571 55.973,59.571 56.429,60.027 56.429,60.032 58.898,62.5 62.045,62.5 62.825,63.279 63.479,63.279 63.8,63.6 63.8,65.25 ; v3(57.7,50.3) 58.35,50.95 U1.42@59.8,50.95 ; U2.2@60.8,65.3 R14.1@62.2,65.3 63.75,65.3 63.8,65.25 ; U6.8@67.075,68.375 65.525,68.375 R28.1@65.5,68.4 64.5,68.4 63.8,67.7 63.8,65.25 ; v3(68.1,36.2) 72.9,31.4 v3(74.6,31.4)
  Bottom Signal w0.152: R22.2@73.6,31.4 v3(74.6,31.4)
  Bottom Signal w0.254: v3(51.125,58.825) 50.1,57.8 50.1,51.7 52.8,49 56.4,49 v3(57.7,50.3) 58.6,50.3 59.3,49.6 59.3,44 60.5,42.8 64.7,42.8 68.1,39.4 v3(68.1,36.2)
NetR15_1: R15.1 R21.1 R23.2 R29.1 U1.43 U2.4 U4.5 U5.15 U6.7 | length 84.4
  Top Signal w0.254: R21.1@53.4,57.8 53.25,57.8 53.027,58.023 53.027,58.026 52.878,58.175 U4.5@52.2,58.175 51.475,58.175 v3(51.1,57.8) 50.2,58.7 50.2,61.8 51.1,62.7 54.5,62.7 55.6,63.8 55.6,68.8 56.4,69.6 62.4,69.6 ; v3(57.6,51.3) 57.641,51.3 57.791,51.45 U1.43@59.8,51.45 ; U2.4@59.9,65.95 U2.4@59.9,65.95 59.902,66.502 60.55,67.15 R15.1@60.7,67.15 60.85,67.15 62.5,68.8 62.5,69.5 62.4,69.6 ; U6.7@67.1,69.6 R29.1@65.5,69.6 62.4,69.6 ; v3(69.1,36.2) 72.3,33 v3(74.6,33) U5.15@76.1,33
  Bottom Signal w0.254: v3(51.1,57.8) 51.1,51.5 53,49.6 55.945,49.6 56.8,50.455 57.524,51.179 57.524,51.183 57.6,51.259 v3(57.6,51.3) 59.1,51.3 59.8,50.6 59.8,44.4 60.6,43.6 65.3,43.6 69.1,39.8 v3(69.1,36.2) ; R23.2@73.6,33 v3(74.6,33)
NetR16_1: R16.1 U2.7 | length 1.2
  Top Signal w0.254: R16.1@57.9,64.65 58.048,64.798 58.998,64.798 U2.7@59,64.8
NetR17_1: R17.1 U4.1 U4.8 | length 6.4
  Top Signal w0.152: U4.1@48.2,60.125 48.2,60.622 48.483,60.905 v3(48.483,60.95) ; v3(51,60.95) 51.974,60.95 52,60.924
  Top Signal w0.254: R17.1@52,61.7 52,60.924 52,60.148 52.023,60.125 U4.8@52.2,60.125
  Bottom Signal w0.152: v3@48.357,60.999 48.434,60.999 v3(48.483,60.95) v3(51,60.95)
NetR18_1: R18.1 U3.23 U4.3 | length 3.3
  Top Signal w0.152: U3.23@45.2,59.5 45.224,59.476 45.672,59.476 45.948,59.2 R18.1@46.6,59.2 46.874,58.926 47.424,58.926 47.526,58.825 U4.3@48.2,58.825
NetR19_1: R19.1 U3.24 U4.4 | length 6.7
  Top Signal w0.152: U3.24@45.2,59.9 45.6,59.9 45.961,60.261 R19.1@46.561,60.261 ; R19.1@46.6,60.3 R19.1@46.561,60.261 ; v3(47.5,58.25) 47.537,58.212 48.162,58.212 U4.4@48.2,58.175 ; v3(47.5,61) 46.75,61 46.5,60.75 46.5,60.321 R19.1@46.561,60.261
  Bottom Signal w0.152: v3(47.5,58.25) v3(47.5,61)
NetR24_1: R24.1 U5.9 | length 2.4
  Top Signal w0.254: U5.9@59.7,28.5 v3(61.3,28.5)
  Bottom Signal w0.254: v3(61.3,28.5) R24.1@62.1,28.5
NetR25_1: R25.1 U5.10 | length 2.4
  Top Signal w0.254: U5.10@59.7,27 v3(61.2,27)
  Bottom Signal w0.254: v3(61.2,27) R25.1@62.1,27
NetR27_2: R27.2 U5.5 | length 5.6
  Top Signal w0.254: R27.2@56.7,31.6 56.6,31.7 56.6,33.7 57.4,34.5 U5.5@59.7,34.5
NetR31_1: R31.1 U1.39 | length 31
  Top Signal w0.254: R31.1@42.6,63.7 v3(44.7,63.7) ; v3(57.8,47.9) 57.809,47.909 58.109,47.909 58.725,48.525 58.725,49.025 59.15,49.45 U1.39@59.8,49.45
  Bottom Signal w0.254: v3(44.7,63.7) 44.741,63.7 44.817,63.624 45.976,63.624 48,61.6 48,50.8 50.9,47.9 v3(57.8,47.9)
NetR32_1: R32.1 U1.40 | length 29.3
  Top Signal w0.254: R32.1@52.8,63.7 53.959,63.7 54.059,63.6 v3(54.1,63.6) ; v3(57.7,48.6) 58,48.6 58.3,48.9 58.3,49.3 58.95,49.95 U1.40@59.8,49.95
  Bottom Signal w0.254: v3(54.1,63.6) 54.1,60.5 53.4,59.8 50.9,59.8 49.6,58.5 49.6,50.9 51.906,48.594 57.694,48.594 v3(57.7,48.6)
NetU1_18: U1.18 U7.6 | length 21
  Top Signal w0.254: U1.18@66.8,51.45 67.705,51.45 68.561,52.306 71.366,52.306 71.992,51.681 71.992,46.708 72.6,46.1 76.5,46.1 77.5,47.1 77.5,49.5 77.94,49.94 U7.6@79,49.94
NetU1_19: U1.19 U7.7 | length 19
  Top Signal w0.254: U1.19@66.8,50.95 67.78,50.95 68.73,51.9 71.198,51.9 71.529,51.569 71.529,46.371 72.3,45.6 77.05,45.6 78.85,47.4 U7.7@79,47.4
NetU1_30: U1.30 U7.5 | length 28.9
  Top Signal w0.254: U1.30@63.55,47.7 63.55,45.65 64.6,44.6 79.5,44.6 81.2,46.3 81.2,51.9 80.62,52.48 U7.5@79,52.48
NetU1_31: U1.31 U7.4 | length 33.7
  Top Signal w0.254: U1.31@63.05,47.7 63.05,45.15 64.2,44 79.8,44 81.8,46 81.8,53.848 80.628,55.02 U7.4@79,55.02
"NetU3_1, 2, 3": U3.1 U3.2 U3.3 | length 0.8
  Top Signal w0.152: U3.3@43.9,60.4 U3.2@44.3,60.4 U3.1@44.7,60.4
"NetU3_4, 5, 6": U3.4 U3.5 U3.6 | length 0.8
  Top Signal w0.152: U3.6@42.7,60.4 U3.5@43.1,60.4 U3.4@43.5,60.4
"NetU3_14, 15": U3.14 U3.15 | length 0.4
  Top Signal w0.152: U3.14@43.1,57.4 U3.15@43.5,57.4
"NetU3_16, 17": U3.16 U3.17 | length 0.4
  Top Signal w0.152: U3.16@43.9,57.4 U3.17@44.3,57.4
RTS: J4.8 U8.7 | length 18.9
  Bottom Signal w0.254: U8.7@98.636,53.123 100.627,53.123 102.5,51.25 105,51.25 106,52.25 106,53.5 106.489,53.989 108.685,53.989 109.906,52.768 109.906,49.864 J4.8@111,48.77
RX: J4.3 U8.13 | length 4.4
  Bottom Signal w0.254: U8.13@104.136,49.303 105.203,49.303 106.09,50.19 J4.3@108.2,50.19
TX: J4.2 U8.14 | length 10.6
  Bottom Signal w0.254: U8.14@104.136,48.033 104.536,48.033 105.253,48.75 108.85,48.75 109.5,49.4 109.5,52.6 109.331,52.769 108.391,52.769 J4.2@108.2,52.96
USB_N: R11.2 U1.32 | length 12
  Top Signal w0.254: R11.2@55.7,41.2 55.7,41.817 cw(c56.383,41.817) 55.9,42.3 cw(c57.693,40.507) 57.693,43.043 61.031,43.043 ccw(c61.031,44.409) 61.998,43.443 62.264,43.709 ccw(c61.573,44.4) 62.55,44.4 U1.32@62.55,47.7
USB_P: R10.2 U1.33 | length 12.7
  Top Signal w0.254: R10.2@54.4,41.2 54.4,41.414 cw(c56.298,41.414) 54.956,42.756 cw(c56.752,40.96) 56.752,43.5 60.952,43.5 ccw(c60.952,44.546) 61.691,43.806 ccw(c60.193,44.939) 62.071,44.939 62.071,47.492 ccw(c62.035,47.492) 62.061,47.518 cw(c62.087,47.544) 62.05,47.544 U1.33@62.05,47.7
V_USB_N: D7.2 J3.A7 J3.B7 R9.1 R11.1 | length 27.2
  Top Signal w0.254: J3.A7@44.557,32.523 J3.A7@44.58,32.5 44.58,32.907 ccw(c44.307,32.907) 44.5,33.1 ccw(c44.259,32.859) 44.259,33.2 43.941,33.2 ccw(c43.941,32.859) 43.7,33.1 ccw(c43.99,32.81) 43.58,32.81 J3.B7@43.58,32.5 cw(c43.532,32.452) 43.6,32.452 43.6,31.1 ccw(c44.437,31.1) 43.845,30.508 44.933,29.421 ccw(c46.086,30.574) 46.086,28.943 49.9,28.943 ; D7.2@49.9,28.275 49.9,28.943 ; R9.1@57,39.8 R11.1@55.7,39.8 ccw(c55.7,39.438) 55.444,39.694 55.374,39.624 ccw(c55.487,39.511) 55.327,39.511 cw(c55.244,39.511) 55.303,39.452 ccw(c55.361,39.394) 55.279,39.394 55.279,39.103 cw(c54.494,39.103) 55.049,38.549 54.25,37.75 ccw(c55.457,36.543) 53.75,36.543 53.75,31.68 cw(c50.899,31.68) 52.915,29.664 52.685,29.434 cw(c51.5,30.618) 51.5,28.943 49.9,28.943
V_USB_P: D6.2 J3.A6 J3.B6 R8.1 R10.1 | length 25.9
  Top Signal w0.254: J3.A6@44.08,32.5 44.08,32.14 ccw(c44.442,32.14) 44.186,31.884 44.292,31.777 ccw(c44.479,31.965) 44.479,31.7 44.619,31.7 ; J3.B6@45.08,32.5 45.057,32.477 45.057,31.938 cw(c44.862,31.938) 45,31.8 cw(c44.759,32.041) 44.759,31.7 44.619,31.7 ; D6.2@51.2,31.225 51.2,29.4 ; R8.1@53.1,39.8 R10.1@54.4,39.8 cw(c54.4,39.438) 54.656,39.694 54.726,39.624 cw(c54.613,39.511) 54.773,39.511 ccw(c54.856,39.511) 54.797,39.452 cw(c54.739,39.394) 54.821,39.394 54.821,39.198 cw(c54.266,39.198) 54.659,38.805 53.927,38.073 ccw(c55.457,36.543) 53.293,36.543 53.293,31.74 cw(c50.753,31.74) 52.549,29.944 52.397,29.792 cw(c51.45,30.739) 51.45,29.4 51.2,29.4 ; 44.619,31.7 ccw(c44.665,31.654) 44.6,31.654 44.6,30.966 ccw(c45.966,30.966) 45,30 45.256,29.744 ccw(c46.086,30.574) 46.086,29.4 51.2,29.4
VBAT: C1.1 C2.1 D1.2 IC1.1 pad.10@37,73 pad.10@47.2,73
  other v2: 36,72 37,72 38,72 46.2,72 47.2,72 48.2,72 36,73 37,73 38,73 46.2,73 47.2,73 48.2,73 36,74 37,74 38,74 46.2,74 47.2,74 48.2,74
  other v4: 36.2,38.1 37.2,38.1 36.2,39.1 37.2,39.1 36.2,40.1 37.2,40.1 36.2,41.1 37.2,41.1
VBUS: C25.1 C26.1 C27.1 D3.1 L1.1
VCC: F1.1 pad.c
  other v2: 26.5,39 27.5,39 28.5,39 29.5,39 30.5,39 26.5,40 27.5,40 28.5,40 29.5,40 30.5,40 26.5,41 27.5,41 28.5,41 29.5,41 30.5,41 26.5,42 27.5,42 28.5,42 29.5,42 30.5,42 26.5,43 27.5,43 28.5,43 29.5,43 30.5,43
WakeUp: R4.1 U1.10 | length 6
  Top Signal w0.152: U1.10@65.05,54.7 65.05,54.875 65.196,55.021 65.196,55.098 65.398,55.3 66.1,55.3 67.7,56.9 69.7,56.9 R4.1@69.9,56.7
pads on no net: IC3.4 J3.A8 J3.B8 J4.1 J4.4 J4.6 J4.9 J5.P1 J5.P8 U1.2 U1.3 U1.4 U1.11 U1.14 U1.21 U1.25 U1.26 U1.27 U1.28 U1.29 U1.38 U1.46 U3.7 U3.12 U3.19 U3.21 U4.7 U5.6 U5.7 U5.11 U5.13 U5.16 U5.17 U5.18 U5.20 U6.6 U7.3 U7.11 U7.18 U7.19 U7.20 U7.21 U7.24 U8.9 U8.10
copper on no net:
  other v7: 41.43,31.28 47.21,31.28

## Polygon pours and split planes (outlines as drawn)
GND on Top Signal "GND_L01_P018" (solid, pour order 18): 30,25 cw(c30,30) 25,30 25,70 cw(c30,70) 30,75 120,75 cw(c120,70) 125,70 125,30 cw(c120,30) 120,25 117,25
NetC28_1 on Top Signal "NETC28_1_L01_P000" (solid, pour order 0): 42.3,33.5 42.3,32 41.5,32 41.5,34.7 44.3,34.7 44.3,36.4 47.1,36.4 47.1,33.6 47.1,32 46.4,32 46.4,33.5
3V3 on Top Signal "3V3_L01_P015" (solid, pour order 15): 42.4,50.6 42.1,50.9 42.1,54 42.4,54.3 51.2,54.3 51.5,54 51.5,51.4 51.3,51.2 45.1,51.2 44.6,51.7 44.6,52.1 44.3,52.4 43.9,52.4 43.6,52.7 42.6,52.7 42.5,52.6 42.5,51.9 42.6,51.8 43.3,51.8 43.6,51.5 43.6,50.9 43.3,50.6
NetPTC1_1 on Top Signal "NETPTC1_1_L01_P011" (solid, pour order 11): 47.4,41 48.6,41 48.9,41.3 48.9,46.5 49.4,47 50,47 50.5,47.5 50.5,49.6 50.1,50 50.1,50.7 49.8,51 48.6,51 48.3,50.7 48.3,49.8 48.2,49.7 45.7,49.7 45.5,49.5 45.5,47.5 46,47 46.6,47 47.1,46.5 47.1,41.3
NetQ2_5 on Top Signal "NETQ2_5_L01_P001" (solid, pour order 1): 50.7,67.25 50.2,67.75 50.2,75 54.45,75 54.45,67.5 54.2,67.25
NetQ1_5 on Top Signal "NETQ1_5_L01_P002" (solid, pour order 2): 40.5,67.25 40,67.75 40,75 44.25,75 44.25,67.5 44,67.25
1V8 on Top Signal "1V8_L01_P016" (solid, pour order 16): 36,51.7 36.4,52.1 40.9,52.1 41.3,51.7 41.3,50.8 41,50.5 36.3,50.5 36,50.8
5V on Top Signal "5V_L01_P007" (solid, pour order 7): 40.3,39.2 40.1,39.4 40.1,41.1 40.4,41.4 43.6,41.4 43.9,41.1 43.9,38.8 44.3,38.4 46.1,38.4 46.3,38.2 46.3,37.9 46.5,37.7 47.5,37.7 47.7,37.9 47.7,39.2 47.9,39.4 48.8,39.4 49,39.6 49,43.5 49.5,44 51.2,44 51.7,43.5 51.7,41.2 51.4,40.9 50.4,40.9 50.2,40.7 50.2,37 49.9,36.7 44.6,36.7 44,37.3 41.6,37.3 41.3,37.6 41.3,38.9 41,39.2
VBUS on Top Signal "VBUS_L01_P006" (solid, pour order 6): 35.5,36.9 35.7,37.1 39.7,37.1 40.1,37.5 40.1,38.7 40.4,39 40.8,39 41.1,38.7 41.1,37.5 41.5,37.1 43.9,37.1 44.1,36.9 44.1,35.7 43.8,35.4 37.4,35.4 37,35.8 35.7,35.8 35.5,36
VBAT on Top Signal "VBAT_L01_P005" (solid, pour order 5): 34.6,41.5 34.4,41.3 34.4,37.5 34.7,37.2 38.8,37.2 39.3,37.7 39.3,41.2 39,41.5
NetD1_1 on Top Signal "NETD1_1_L01_P004" (solid, pour order 4): 32.9,44 32.6,43.7 32.6,40.8 33,40.4 33.7,40.4 34.1,40.8 34.1,41.4 34.5,41.8 35.1,41.8 35.5,42.2 35.5,43.6 35.1,44
VCC on Top Signal "VCC_L01_P003" (solid, pour order 3): 25,36.5 32,36.5 32.5,37 32.5,44 33,44.5 35.1,44.5 35.1,44.6 35.5,45 35.5,47 35,47.5 25,47.5
GND on Bottom Signal "GND_L06_P012" (solid, pour order 12): 30,25 cw(c30,30) 25,30 25,70 cw(c30,70) 30,75 120,75 cw(c120,70) 125,70 125,30 cw(c120,30) 120,25 117,25
NetQ2_5 on Bottom Signal "NETQ2_5_L06_P017" (solid, pour order 17): 50.7,67.25 50.2,67.75 50.2,75 54.45,75 54.45,67.5 54.2,67.25
NetQ1_5 on Bottom Signal "NETQ1_5_L06_P014" (solid, pour order 14): 40.5,67.25 40,67.75 40,75 44.25,75 44.25,67.5 44,67.25
VBAT on Power "VBAT_L03_P013" (solid, pour order 13): 34.4,41.3 34.4,37.5 34.7,37.2 38.8,37.2 39.3,37.7 39.3,41.2 39,41.5 37.5,41.5 37,42 37,55.75 37.75,56.5 39.5,56.5 40.5,57.5 40.5,63.5 41.5,64.5 49.25,64.5 49.75,65 49.75,75 44.6,75 44.6,67.6 43.9,66.9 40.1,66.9 39.6,67.4 39.6,75 34.4,75 34.4,48.5
GND on GND 2 "GND_L05_P010" (solid, pour order 10): 30,25 cw(c30,30) 25,30 25,70 cw(c30,70) 30,75 120,75 cw(c120,70) 125,70 125,30 cw(c120,30) 120,25 117,25
GND on GND1 "GND_L02_P009" (solid, pour order 9): 30,25 cw(c30,30) 25,30 25,70 cw(c30,70) 30,75 120,75 cw(c120,70) 125,70 125,30 cw(c120,30) 120,25 117,25

## Other copper
Top Signal:
  region net 3V3: 51.9,54 53.4,55.5 54.9,54
  region net 3V3: 86.4,53.5 87.2,54.3 88,53.5
  region net NetR14_1: 63.775,64.5 62.975,65.3 63.775,66.1
  region net NetR15_1: 63.3,69.6 62.5,68.8 61.7,69.6
  region net 1V8: 49.3,58.7 48.5,59.5 49.3,60.3
  region net 1V8: 34.9,60.2 35.7,59.4 34.9,58.6
  region net 3V3: 64,62.3 65.5,63.8 67,62.3
  region net 3V3: 65.4,67.1 66.9,65.6 65.4,64.1
  region net 3V3: 73.75,65.75 72.25,64.25 70.75,65.75
  region net 3V3: 56,54 54.5,52.5 53,54

## Silkscreen, mask and mechanical layers (free items; w line width, h text height)
Top Overlay:
  drawing of 1984 lines, arcs and shapes, not listed
  text "Q1" at 39,71 h2 r180
  text "Q2" at 49.2,71 h2 r180
  text "RST" at 66.45,58.934 h0.8 r90
  text "1V8" at 36,56.15 h0.8
  text "GND" at 25,55.5 h2 r270
  text "WakeUp" at 77.283,54.734 h0.8 r90
  text "VBAT" at 25,48.5 h2 r270
  text "3V3" at 52.65,47.834 h0.8 r90
  text "BOOT" at 54.234,46.05 h0.8
  text "5V" at 50.034,36.95 h0.8
Bottom Overlay:
  drawing of 1999 lines, arcs and shapes, not listed
  text "GND" at 35,75 h2 r90
  text "GND" at 54.25,71 h2 r270
  text "SWCLK" at 111.4,68.816 h0.8 r90
  text "SWDIO" at 108.85,68.749 h0.8 r90
  text "3V3" at 107.38,66.708 h1.5
  text "GND" at 115,66.708 h1.5
  text "TEST" at 77,54 h2
  text "GPS" at 76.95,43.7 h2
  text "v1.0.0" at 99,29.5 h3
  text "Alpina Flight Control Computer" at 110.013,28.417 h0.8
  text "17/02/2024" at 110.049,27.15 h0.8
Mechanical 13:
  lines w0.4: 105,21 105,22 ; 105,23 105,22 ; 124,28 123,28 ; 132.5,45.5 187.5,45.5 ; 154,32 154,45.5 ; 105,22 117,22 123,22 124,23 125,24 125,26 123,28 ; 123,28 123,27 123,28
  text "Alpina Main Flight Control Computer Board v1.0" at 29.8,90.466 h2
  text "This project was made according to the TEKNOFEST Rocket Competition 2025 specifications. It may have deficiencies and can be improved. It has not been tested." at 29.381,84.5 h1
  text "CERN-OHL-S   /  / This project is licensed under the **CERN Open Hardware License Strongly Reciprocal (CERN-OHL-S)**.   /  / This open-source project may be used, modified, and distributed by individuals or organizations for **hobby, academic, commercial, or other purposes**. However, all derived works must also be **shared under the CERN-OHL-S license**.   /  / 📜 **Copyright © 2025 Mergen Elektronik**   / 📜 **Copyright © 2025 Ekrem Turan Firat**   /  / For more information, please contact: 📩 **ekremturanfirat@mergenelk.com**   /  / 🔗 For detailed information about CERN-OHL-S, please visit: [https://ohwr.org/cern_ohl_s_v2.txt](https://ohwr.org/cern_ohl_s_v2.txt)" at 132.5,47 h0.8
  text "Project Document Page:  / github.com/ekremturanfirat/Alpina_MainFCC /  / You can contact us with  / ekremturanfirat@mergenelk.com" at 155,37 h0.8
  text "Avionic Design Team: / Lead: Ekrem Turan FIRAT / Team Members; / Aycin ERBIL / Ayse Hazal DEMIRCI / Busra YILMAZ / Fatmanur OZEN / Meryem SEN" at 132.5,32.5 h0.8
  text "3,20/5,00 (mm) diameter" at 105.769,22.917 h0.8

## Dimensions
124.9,65.55 to 124.9,34.75 on Mechanical 13
25,70 to 125,70 on Mechanical 13
30,70 to 120,70 on Mechanical 13
30,75 to 30,25 on Mechanical 13
30,70 to 30,30 on Mechanical 13